# Altium PCB OpenOBS_328p_USB-copy_2026-08-19.pcbdoc
Units mm, origin at the board's own origin, x right, y up, seen from the top; angles counter-clockwise.
Board outline 128.78 x 54.48 mm, 2 copper layers (Top Layer, Bottom Layer); 43 components, 47 nets, 174 pads, 117 vias.
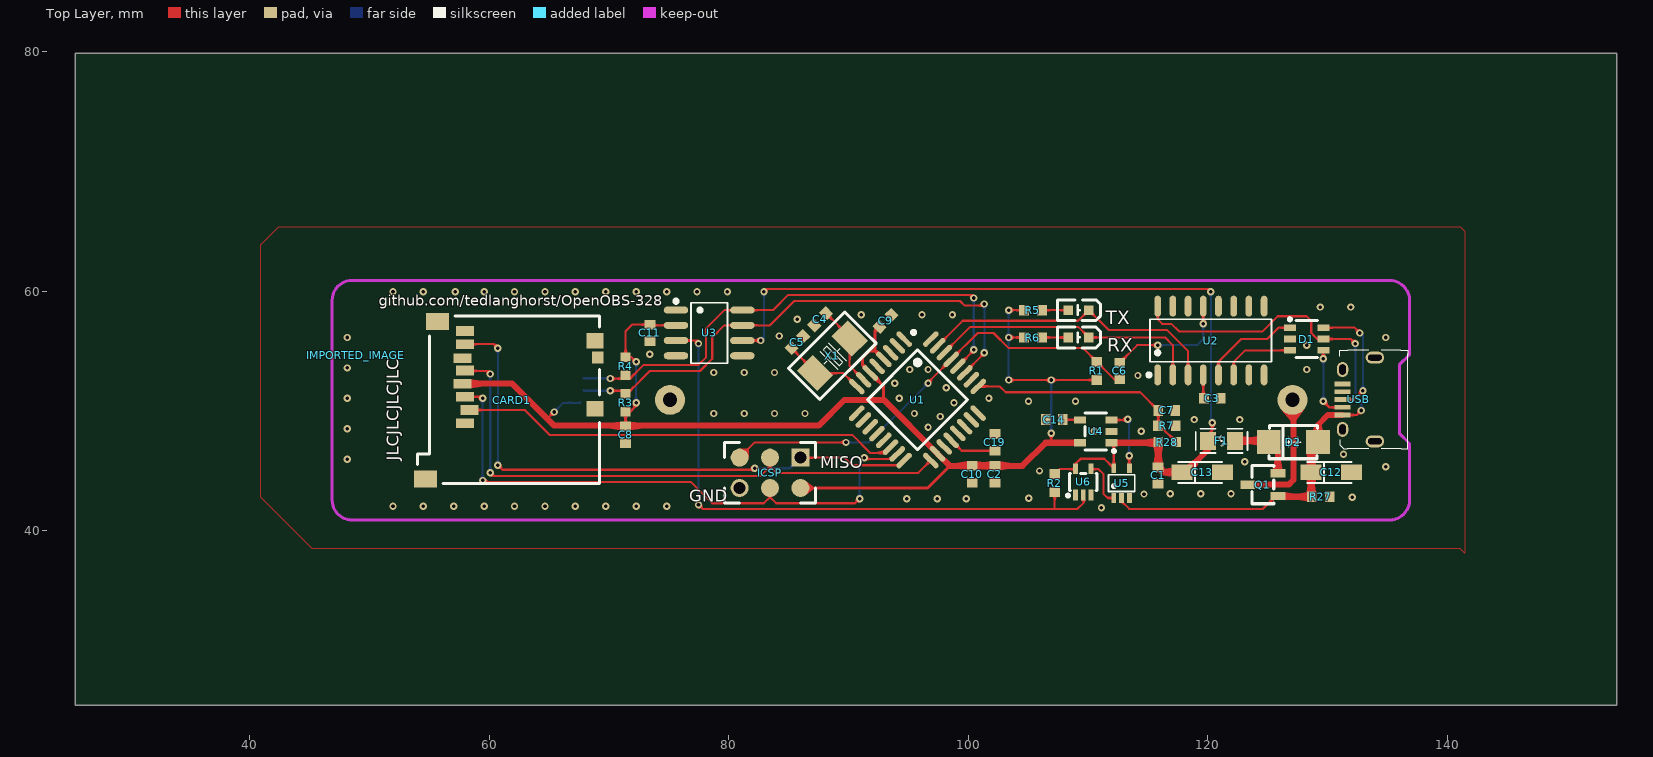
[diagram p0: Top Layer view]
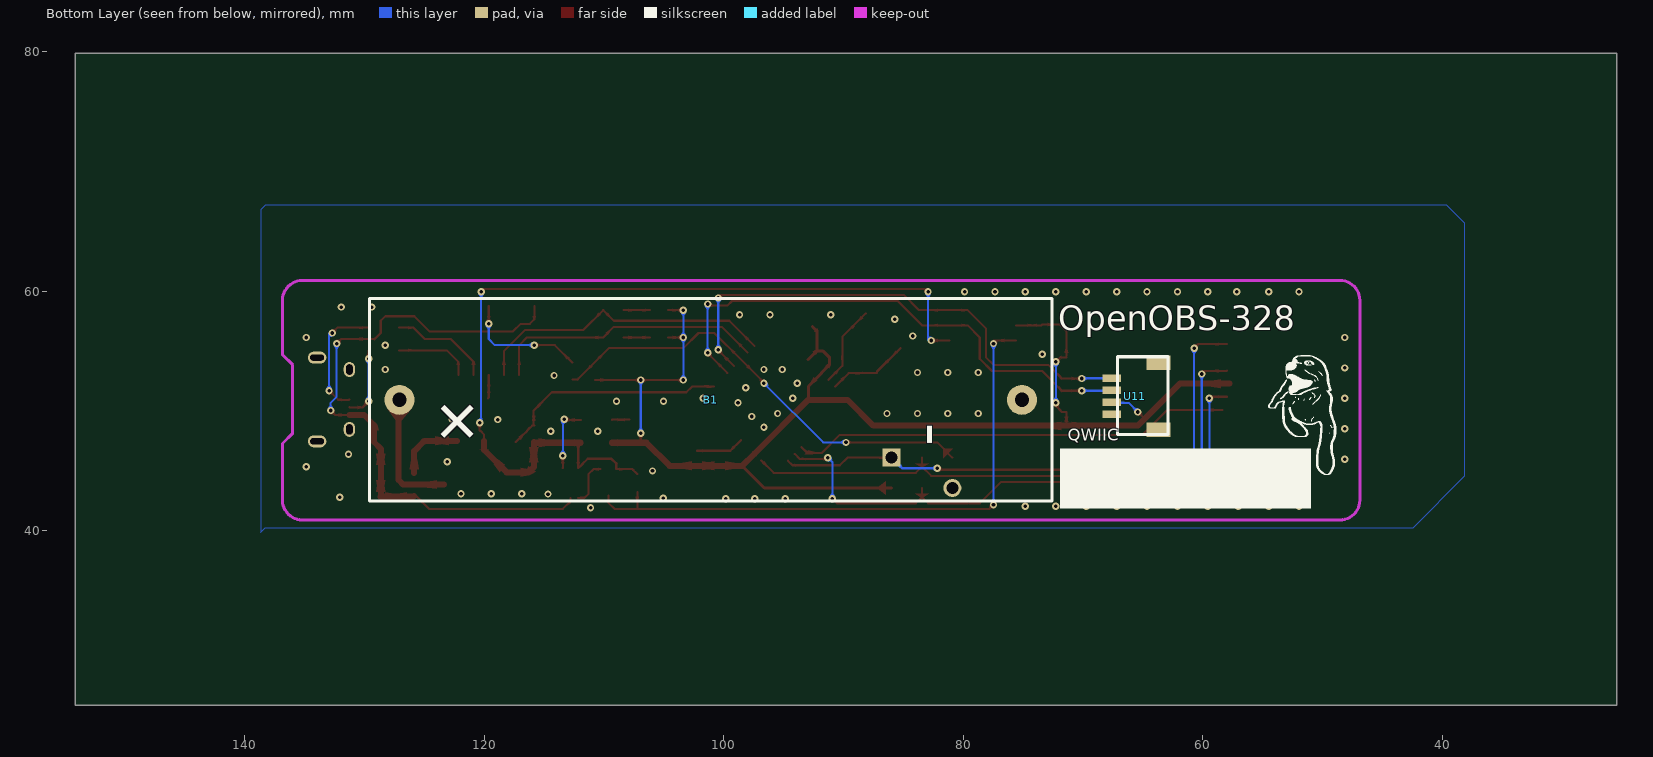
[diagram p1: Bottom Layer view, seen from below]

## Layer stack, top to bottom
Top Layer: signal copper (thickness not stored)
Dielectric: dielectric 0.32, FR-4, Dk 4.8
Bottom Layer: signal copper (thickness not stored)

## Board outline
154.178,25.4 25.4,25.4 25.4,79.883 154.178,79.883

## Components (designator, comment, footprint, x,y, rotation, side; value= is the part's Value field where it differs from the comment)
B1 "KEYSTONE 2460 1XAA" "KEYSTONE 2460 1XAA" 101.092,50.927 r0 bottom
C1 "1uF" C0603 115.858,44.609 r90 top
C2 "1uF" C0603 102.235,44.704 r270 top
C3 "10nF" C0603 120.396,51.054 r0 top
C4 "22pF" C0603 87.63,57.658 r225 top
C5 "22pF" C0603 85.725,55.753 r225 top
C6 "100nF" C0603 112.649,53.34 r270 top
C7 "1nF" C0603 116.586,50.038 r180 top
C8 "100nF" C0603 71.374,48.006 r90 top
C9 "100nF" C0603 93.091,57.531 r225 top
C10 "100nF" C0603 100.33,44.704 r90 top
C11 "100nF" C0603 73.406,56.515 r90 top
C12 "10uF" CAP-SMD_L3.2-W1.6-R-RD 130.336,44.863 r0 top
C13 "10uF" CAP-SMD_L3.2-W1.6-R-RD 119.541,44.863 r0 top
C14 "470pF" C0603 107.188,49.276 r0 top
C19 "1uF" C0603 102.235,47.371 r270 top
CARD1 "473521001" SD-SMD_SD-47352-101 61.849,50.893 r90 top
D1 "USBLC6-2SC6" SOT-23-6_L2.9-W1.6-P0.95-LS2.8-BR 128.27,56.007 r180 top
D2 "SS210" SMA_L4.3-W2.6-LS5.2-RD 127.161,47.403 r0 top
F1 "SMD0805B050TF" F0805 121.158,47.498 r180 top
ICSP "ICSP_2X3" CON2X3 83.439,44.831 r270 top
IMPORTED_IMAGE "IMPORTED_IMAGE" IMPORTED_IMAGE 48.833,54.642 r0 top
Q1 "SI2301CDS-T1-GE3" SOT-23-3_L3.0-W1.7-P0.95-LS2.9-BR 124.62,43.848 r0 top
R1 "10k" R0603 110.744,53.34 r270 top
R2 "100K" R0603 107.222,43.974 r90 top
R3 "4.7K" R0603 71.374,50.673 r270 top
R4 "4.7K" R0603 71.374,53.721 r90 top
R5 "1kΩ" R0603 105.41,58.42 r180 top
R6 "1kΩ" R0603 105.41,56.134 r180 top
R7 "1MΩ" R0603 116.586,48.768 r180 top
R27 "100K" R0603 129.447,42.831 r180 top
R28 "10M" R0603 116.62,47.403 r180 top
RX "19-213/Y2C-CQ2R2L/3T(CY)" LED0603-R-RD 109.22,56.134 r180 top
TX "19-213/Y2C-CQ2R2L/3T(CY)" LED0603-R-RD 109.22,58.42 r180 top
U1 "ATMEGA328P-AU" TQFP-32_L7.0-W7.0-P0.80-LS9.0-BL 95.758,50.927 r225 top
U2 "CH340C" SOP-16_L10.0-W3.9-P1.27-LS6.0-BL 120.269,55.88 r0 top
U3 "DS3231MZ+" SOIC-8_L4.9-W3.9-P1.27-LS6.0-BL 78.359,56.515 r270 top
U4 "TC1185-3.3VCT713" SOT-23-5_L3.0-W1.7-P0.95-LS2.8-BR 110.651,48.292 r0 top
U5 "74AHC1G32GW,125" SOT-353_L2.2-W1.4-P0.65-LS2.4-BR 112.81,43.974 r270 top
U6 "SN74LVC1G14DCKR" SC-70-5_L2.1-W1.3-P0.65-LS2.1-BR 109.601,44.069 r270 top
U11 "QWIIC" "QWIIC CONNECTOR" 66.802,50.927 r270 bottom
USB "10118194-0001LF" MICRO-USB-SMD_10118194-0001LF 132.622,50.959 r90 top
X1 "8MHz" CRYSTAL-SMD_L5.0-W3.2 88.646,54.61 r45 top

## Footprints (in the part's own frame and the unit in brackets; to place one, negate y for a bottom-side part, rotate by r counter-clockwise, add the part's x,y. Pads: shape width x height; smd on the part's side, far side on the other; paste and mask are expansions set on the pad)
C0603 [mm]
  rect 0.8x0.9 smd paste+0 mask+0.051: 1(-0.7,0) 2(0.7,0)
CAP-SMD_L3.2-W1.6-R-RD [mm]
  rect 1.758x1.296 smd paste+0 mask+0.051: 1(-1.686,0) 2(1.686,0)
  silkscreen extent -2.06,-0.95 1.68,0.95
CON2X3 [mm]
  rect 1.5x1.5 hole 1.016 paste+0 mask+0.102: 1(-1.27,2.54)
  round 1.5 smd paste+0 mask+0.102: 2(1.27,2.54) 3(-1.27,0) 4(1.27,0) 5(-1.27,-2.54)
  round 1.5 hole 1.016 paste+0 mask+0.102: 6(1.27,-2.54)
  silkscreen extent -2.54,-3.81 2.54,3.81
CRYSTAL-SMD_L5.0-W3.2 [mm]
  rect 1.9x2.4 smd paste+0 mask+0.051: 1(-2.05,0) 2(2.05,0)
  silkscreen extent -3.32,-1.85 3.33,1.85
F0805 [mm]
  rect 1.335x1.5 smd paste-100 mask+0.051: 1(-1.142,0) 2(1.142,0)
  silkscreen extent -2.16,-1.02 2.16,1.02
IMPORTED_IMAGE [mm]
"KEYSTONE 2460 1XAA" [mm]
  round 2.5 hole 1.2 paste+0 mask+0.102: 1(26,0) 2(-26,0)
  silkscreen extent -28.5,-8.45 28.5,8.45
LED0603-R-RD [mm]
  rect 0.8x0.8 smd paste+0 mask+0.051: 1(0.851,0) 2(-0.851,0)
  silkscreen extent -1.82,-0.86 1.77,0.86
MICRO-USB-SMD_10118194-0001LF [mm]
  rect 0.4x1.35 smd paste-100 mask+0.051: 1(-1.301,1.35) 2(-0.65,1.35) 3(0,1.35) 4(0.65,1.35) 5(1.3,1.35)
  oval 1x1.55 hole 0.5 slot 1.15 at 90 deg paste+0 mask+0.051: 6(-3.5,-1.35) 6(3.5,-1.35)
  oval 1.25x0.95 hole 0.55 slot 0.85 at 0 deg paste+0 mask+0.051: 6(-2.499,1.35) 6(2.499,1.35)
  silkscreen extent -4.1,-4.1 4.1,1.6
"QWIIC CONNECTOR" [mm]
  rect 0.6x1.55 smd paste+0 mask+0.051: 1(1.2,-0.8) 2(0.2,-0.8) 3(-0.8,-0.8) 4(-1.8,-0.8)
  rect 1.2x2 smd paste+0 mask+0.051: 5(-3.1,3.1) 6(2.5,3.1)
  silkscreen extent -3.6,-0.3 2.9,3.9
R0603 [mm]
  rect 0.806x0.864 smd paste-100 mask+0.051: 1(-0.753,0) 2(0.753,0)
SC-70-5_L2.1-W1.3-P0.65-LS2.1-BR [mm]
  rect 0.9x0.4 smd paste+0 mask+0.051: 1(1.1,-0.65) 2(1.1,0) 3(1.1,0.65) 4(-1.1,0.65) 5(-1.1,-0.65)
  silkscreen extent -0.7,-1.4 1.27,1.15
SD-SMD_SD-47352-101 [mil]
  rect 31.5x59.1 smd paste+0 mask+2: 1(-75.35,153.5) 2(-32.05,137.7) 3(11.25,153.5) 4(54.55,161.3) 5(97.85,153.5) 6(137.79,161.42) 7(184.45,153.5)
  rect 31.5x59.05 smd paste+0 mask+2: 8(227.75,153.45)
  rect 39.37x37.4 smd paste+0 mask+2: 9(141.2,-282.95)
  rect 55.1x74.8 smd paste+0 mask+2: EH(-258.85,282.95) EH(258.85,243.65)
  rect 51.18x55.12 smd paste+0 mask+2: EH(-28.5,-274.1) EH(195.9,-274.1)
  silkscreen extent -275,-290 277,309
SMA_L4.3-W2.6-LS5.2-RD [mm]
  rect 2x2 smd paste+0 mask+0.102: 1(-2.057,0) 2(2.057,0)
  silkscreen extent -2.03,-1.4 2.01,1.4
SOIC-8_L4.9-W3.9-P1.27-LS6.0-BL [mm]
  oval 0.588x2.045 smd paste+0 mask+0.051: 1(-1.905,-2.773) 2(-0.635,-2.773) 3(0.635,-2.773) 4(1.905,-2.773) 5(1.905,2.773) 6(0.635,2.773) 7(-0.635,2.773) 8(-1.905,2.773)
  silkscreen extent -2.8,-2.92 2.53,1.52
SOP-16_L10.0-W3.9-P1.27-LS6.0-BL [mm]
  oval 0.56x1.745 smd paste+0 mask+0.051: 1(-4.445,-2.873) 2(-3.175,-2.873) 3(-1.905,-2.873) 4(-0.635,-2.873) 5(0.635,-2.873) 6(1.905,-2.873) 7(3.175,-2.873) 8(4.445,-2.873) 9(4.445,2.873) 10(3.175,2.873) 11(1.905,2.873) 12(0.635,2.873) 13(-0.635,2.873) 14(-1.905,2.873) 15(-3.175,2.873) 16(-4.445,2.873)
  silkscreen extent -5.33,-3.02 5.08,1.77
SOT-23-3_L3.0-W1.7-P0.95-LS2.9-BR [mm]
  rect 1.25x0.7 smd paste+0 mask+0.102: 1(1.25,-0.95) 2(1.25,0.95) 3(-1.25,0)
  silkscreen extent -0.9,-1.6 0.9,1.6
SOT-23-5_L3.0-W1.7-P0.95-LS2.8-BR [mm]
  rect 1x0.6 smd paste+0 mask+0.051: 1(1.3,-0.95) 2(1.3,0) 3(1.3,0.95) 4(-1.3,0.95) 5(-1.3,-0.95)
  silkscreen extent -0.9,-1.78 1.65,1.55
SOT-23-6_L2.9-W1.6-P0.95-LS2.8-BR [mm]
  rect 1x0.55 smd paste+0 mask+0.051: 1(1.4,-0.95) 2(1.4,0) 3(1.4,0.95) 4(-1.4,0.95) 5(-1.4,0) 6(-1.4,-0.95)
  silkscreen extent -0.9,-1.78 1.52,1.55
SOT-353_L2.2-W1.4-P0.65-LS2.4-BR [mm]
  rect 0.8x0.4 smd paste+0 mask+0.051: 1(1.25,-0.65) 2(1.25,0) 3(1.25,0.65) 4(-1.25,0.65) 5(-1.25,-0.65)
  silkscreen extent -0.7,-1.1 0.7,1.1
TQFP-32_L7.0-W7.0-P0.80-LS9.0-BL [mm]
  oval 0.45x1.65 smd paste+0 mask+0.051: 1(-2.8,-4.369) 2(-2,-4.369) 3(-1.2,-4.369) 4(-0.4,-4.369) 5(0.4,-4.369) 6(1.2,-4.369) 7(2,-4.369) 8(2.8,-4.369) 17(2.8,4.369) 18(2,4.369) 19(1.2,4.369) 20(0.4,4.369) 21(-0.4,4.369) 22(-1.2,4.369) 23(-2,4.369) 24(-2.8,4.369)
  oval 1.65x0.45 smd paste+0 mask+0.051: 9(4.382,-2.8) 10(4.382,-2) 11(4.381,-1.2) 12(4.381,-0.4) 13(4.381,0.4) 14(4.381,1.2) 15(4.382,2) 16(4.382,2.8) 25(-4.382,2.8) 26(-4.382,2) 27(-4.381,1.2) 28(-4.381,0.4) 29(-4.381,-0.4) 30(-4.381,-1.2) 31(-4.382,-2) 32(-4.382,-2.8)
  silkscreen extent -3.91,-4.36 2.94,2.95

## Via types
v1: diameter 0.61, hole 0.305, Top Layer to Bottom Layer, tented both sides, 117 vias

## Nets (pads, with @x,y where several pads share a name; then routed paths per layer and width w, separated by ;. In a path a pad name is that pad's centre, name@x,y a point inside that pad or via, vN(x,y) a via of type N, cw(c..) or ccw(c..) an arc to the next point about the centre after c; other vN are vias at no path point)
C4_1: C4.1 U1.7 X1.2 | length 6.8
  Top Layer w0.175: C4.1 90.096,56.182 X1.2 90.096,53.762 U1.7
C5_2: C5.2 U1.8 X1.1 | length 6.9
  Top Layer w0.175: C5.2 87.196,53.292 X1.1 89.565,53.16 U1.8
C19_2: C19.2 U1.20 | length 4
  Top Layer w0.175: U1.20 99.449,46.67 C19.2
CS: CARD1.2 U1.14 | length 36.9
  Top Layer w0.175: CARD1.2@58.351,50.081 62.949,50.081 65.024,48.006 90.297,48.006 91.821,46.482 93.01,46.482 U1.14
GND: B1.2 C1.1 C2.2 C3.2 C4.2 C5.1 C7.1 C8.1 C9.1 C10.1 C11.1 C12.2 C13.2 C14.1 C19.1 CARD1.6 CARD1.EH D1.2 ICSP.6 R7.1 R27.1 U1.3 U1.5 U1.21 U2.1 U3.5 U4.2 U5.3 U6.3 U11.1 USB.5 USB.6
  other v1: 111.125,41.91 51.943,42.037 54.483,42.037 57.023,42.037 59.563,42.037 62.103,42.037 64.643,42.037 67.183,42.037 69.723,42.037 72.263,42.037 74.803,42.037 94.869,42.672 97.409,42.672 99.822,42.672 105.063,42.704 132.08,42.799 114.681,43.053 116.874,43.085 119.414,43.085 121.954,43.085 105.952,44.99 134.874,45.339 123.097,45.752 48.133,45.974 131.351,46.387 110.524,48.292 114.461,48.292 48.133,48.514 96.647,48.641 118.872,49.276 122.682,49.276 97.663,49.53 78.74,49.784 81.28,49.784 83.82,49.784 86.36,49.784 95.504,49.784 98.806,50.673 105.029,50.8 108.966,50.8 48.133,51.054 94.234,51.054 101.727,51.054 98.171,51.943 93.853,52.324 114.173,52.959 78.74,53.213 81.28,53.213 83.82,53.213 95.123,53.467 96.647,53.467 128.27,53.467 48.133,53.594 73.406,54.737 128.27,55.499 48.133,56.134 134.874,56.134 84.201,56.261 85.725,57.658 91.059,58.039 96.139,58.039 98.679,58.039 129.413,58.674 131.953,58.674 51.943,59.944 54.483,59.944 57.15,59.944 59.563,59.944 62.103,59.944 64.643,59.944 67.183,59.944 69.723,59.944 72.263,59.944 74.803,59.944 77.343,59.944 79.883,59.944
MISO: CARD1.7 ICSP.1 U1.16 | length 47.7
  Top Layer w0.175: CARD1.7 60.373,55.578 v1(60.706,55.244) ; v1(60.706,45.465) 61.087,45.085 78.613,45.085 82.042,45.085 v1(82.169,45.212) ; v1@82.169,45.086 v1(82.169,45.212) ; ICSP.1 89.662,46.101 90.297,45.466 94.257,45.466 U1.16
  Bottom Layer w0.175: v1(60.706,45.465) v1(60.706,55.244) ; v1(82.169,45.212) 85.09,45.212 ICSP.1
MOSI: CARD1.3 ICSP.4 U1.15 | length 49.2
  Top Layer w0.175: CARD1.3@57.95,51.181 59.309,51.181 v1(59.436,51.053) ; v1(59.436,44.195) 59.563,44.069 76.835,44.069 78.613,42.291 79.502,42.291 ; 79.629,42.292 82.931,42.292 83.439,42.8 ; v1(90.932,42.672) 90.551,42.292 83.947,42.292 83.439,42.8 ; v1(91.313,46.101) 91.44,46.101 91.567,45.974 93.632,45.974 U1.15@94.074,46.416 ; 83.439,42.8 ICSP.4 83.439,42.8
  Bottom Layer w0.175: v1(59.436,44.195) v1(59.436,51.053) ; v1(90.932,42.672) 90.932,45.721 v1(91.313,46.101)
PINTERRUPT: R2.1 U3.3 U6.2 | length 50
  Top Layer w0.175: U3.3 77.216,55.88 v1(77.47,55.626) ; v1(77.47,42.164) 77.818,41.816 109.126,41.816 109.634,42.324 U6.2@109.634,42.941 ; R2.1 107.221,41.829 107.234,41.816
  Bottom Layer w0.175: v1(77.47,42.164) 77.47,49.022 77.47,51.562 77.47,52.07 v1(77.47,55.626)
PRESET: C6.2 ICSP.5 R1.1 U1.29 | length 37.7
  Top Layer w0.175: ICSP.5 82.169,47.372 v1(89.789,47.371) ; v1(96.647,52.324) 96.647,52.382 U1.29 100.78,56.515 102.108,56.515 103.375,55.248 109.601,55.245 ; 109.593,55.245 R1.1 112.197,52.639 C6.2
  Bottom Layer w0.175: v1(89.789,47.371) 91.694,47.372 v1(96.647,52.324)
Q1_2: D2.1 F1.1 Q1.2 | length 5.8
  Top Layer w0.508: F1.1 125.009,47.498 D2.1 125.87,46.637 Q1.2
R28_1: C7.2 R7.2 R28.1 U1.25 | length 19.3
  Top Layer w0.175: U1.25 102.641,52.045 103.124,51.562 114.361,51.562 C7.2 115.885,48.821 R7.2 116.007,48.768 R28.1
RX: RX.2 U1.30 U2.2 | length 23.1
  Top Layer w0.175: U1.30 100.157,57.023 101.3,57.023 109.182,57.023 RX.2 116.459,56.134 117.094,55.499 U2.2
RX_1: R6.1 RX.1 | length 2.2
  Top Layer w0.175: R6.1@106.164,56.134 RX.1
S$174694: 
S$174698: 
S$174702: 
SCK: CARD1.5 ICSP.3 U1.17 | length 49.9
  Top Layer w0.175: CARD1.5@57.95,53.381 57.988,53.34 59.817,53.34 v1(60.071,53.085) ; v1(60.071,44.83) 60.325,44.577 82.676,44.577 83.439,45.34 ; 86.995,44.831 95.839,44.831 U1.17 ; 86.995,44.832 83.947,44.832 83.439,45.34 ; 83.439,45.34 ICSP.3 83.439,45.34
  Bottom Layer w0.175: v1(60.071,44.83) v1(60.071,53.085)
SCL: R4.1 U1.28 U3.8 U11.4 | length 43.4
  Top Layer w0.175: v1(70.104,52.705) 71.755,52.705 72.898,53.848 77.47,53.848 78.105,54.483 78.105,55.222 ; 78.105,55.118 78.105,56.896 79.629,58.42 U3.8 83.693,58.42 84.963,59.69 99.314,59.69 100.203,59.69 v1(100.457,59.436) ; U1.28 100.457,55.06 v1(100.457,55.118)
  Bottom Layer w0.175: U11.4@67.856,52.728 70.081,52.728 v1(70.104,52.705) ; v1(100.457,55.118) v1(100.457,59.436)
SDA: R3.1 U1.27 U3.7 U11.3 | length 44.4
  Top Layer w0.175: v1(70.104,51.689) 71.755,51.689 73.406,53.34 73.787,53.34 77.597,53.34 78.613,54.356 78.613,54.568 ; 78.613,54.483 78.613,56.134 79.629,57.15 U3.7 83.439,57.15 85.471,59.182 99.314,59.182 99.695,58.801 101.219,58.801 v1(101.346,58.928) ; U1.27 101.346,54.818 v1(101.346,54.864)
  Bottom Layer w0.175: U11.3@67.856,51.727 67.894,51.689 v1(70.104,51.689) ; v1(101.346,54.864) v1(101.346,58.928)
TX: TX.2 U1.31 U2.3 | length 25.6
  Top Layer w0.175: U1.31@97.442,55.438 99.535,57.534 100.678,57.534 ; 100.679,57.532 109.182,57.532 ; 109.182,57.531 TX.2 111.722,56.769 114.808,56.769 116.586,56.769 118.364,54.991 U2.3
TX_1: R5.1 TX.1 | length 2.2
  Top Layer w0.175: R5.1@106.164,58.42 TX.1
U1_1: U1.1
U1_2: U1.2
U1_9: U1.9
U1_10: U1.10
U1_11: U1.11
U1_12: U1.12
U1_13: U1.13
U1_19: U1.19
U1_22: U1.22
U1_23: U1.23
U1_24: U1.24
U1_26: U1.26
U1_32: U1.32
U2_4: C3.1 U2.4 | length 2
  Top Layer w0.175: U2.4 119.634,51.115 C3.1
U2_5: D1.1 U2.5 | length 8.5
  Top Layer w0.175: U2.5 120.904,54.102 122.809,56.007 124.968,56.007 125.918,56.957 D1.1@127.124,56.957
U2_6: D1.3 U2.6 | length 6.4
  Top Layer w0.175: U2.6 122.174,54.102 123.129,55.057 D1.3@127.124,55.057
U2_13: C6.1 U2.13 | length 10.5
  Top Layer w0.175: C6.1 114.107,55.499 v1(115.824,55.499) ; v1(119.634,57.277) U2.13
  Bottom Layer w0.175: v1(115.824,55.499) 119.126,55.5 119.634,56.008 v1(119.634,57.277)
U4_4: C14.2 U4.4 | length 1.5
  Top Layer w0.175: C14.2 109.316,49.276 U4.4@109.352,49.24
U5_1: U5.1 U6.4 | length 3.8
  Top Layer w0.175: U6.4@110.284,45.141 110.881,45.141 111.285,44.737 111.285,43.086 111.646,42.725 U5.1@112.159,42.725
U5_4: U4.3 U5.4 | length 5.5
  Top Layer w0.175: U4.3@111.95,49.243 113.251,49.243 v1(113.318,49.308) ; v1(113.445,46.26) 113.444,45.24 U5.4
  Bottom Layer w0.175: v1(113.318,49.308) 113.445,49.182 v1(113.445,46.26)
USB_2: D1.4 USB.2 | length 6.1
  Top Layer w0.175: v1(129.667,50.8) 130.175,50.292 131.254,50.292 USB.2@131.272,50.307 ; v1(129.667,54.356) D1.4
  Bottom Layer w0.175: v1(129.667,50.8) v1(129.667,54.356)
USB_3: D1.6 USB.3 | length 10.2
  Top Layer w0.175: D1.6 132.273,56.957 v1(132.715,56.515) ; USB.3@131.272,50.957 131.303,50.927 132.207,50.927 v1(132.969,51.689)
  Bottom Layer w0.175: v1(132.715,56.515) 132.969,56.261 v1(132.969,51.689)
VBAT: B1.1 Q1.3 | length 10.7
  Top Layer w0.508: Q1.3 126.779,43.848 127.16,44.229 127.16,50.927 B1.1
VCC: C2.1 C8.2 C9.2 C10.2 C11.2 CARD1.4 ICSP.2 R1.2 R3.2 R4.2 R5.2 R6.2 U1.4 U1.6 U1.18 U3.2 U4.5 U11.2 | length 117.9
  Top Layer w0.175: 64.835,49.338 65.405,49.907 v1(65.405,49.911) ; C8.2 R3.2 71.763,49.919 72.263,50.419 v1(72.263,50.673) ; R4.2 71.89,54.475 v1(72.263,54.102) ; R4.2@71.374,54.602 71.374,56.642 71.948,57.216 C11.2 73.472,57.15 U3.2 ; v1(103.378,52.578) v1(106.934,52.578) R1.2 ; v1(103.378,56.134) R6.2 ; v1(103.378,58.42) R5.2 ; 106.934,47.343 v1(106.934,48.133)
  Top Layer w0.254: ICSP.2 96.609,43.562 98.453,45.406 ; C9.2 92.202,56.642 92.202,55.049 U1.4 92.26,54.991 91.694,54.991 91.186,54.483 91.186,53.848 91.821,53.213 U1.6 92.928,52.057 92.928,50.927
  Top Layer w0.508: CARD1.4 61.892,52.278 65.405,48.768 87.503,48.768 89.662,50.927 92.928,50.927 U1.18 98.453,45.405 C10.2 C2.1 104.521,45.405 106.459,47.343 U4.5@109.349,47.343
  Bottom Layer w0.175: v1(65.405,49.911) 66.167,50.673 67.549,50.673 U11.2 ; v1(72.263,50.673) v1(72.263,54.102) ; v1(103.378,52.578) v1(103.378,56.134) v1(103.378,58.42) ; v1(106.934,48.133) v1(106.934,52.578)
VIN: C1.2 C13.1 F1.2 R2.2 R28.2 U3.6 U4.1 U5.5 U6.5 | length 76.1
  Top Layer w0.175: U3.6 v1(82.677,55.88) ; v1(82.931,59.944) 83.185,60.198 84.963,60.198 120.015,60.198 ; R2.2@107.221,44.729 107.632,45.141 108.984,45.141 108.984,45.611 109.38,46.007 111.376,46.007 U5.5 112.159,47.135 U4.1@111.95,47.343 ; F1.2 120.015,48.006 120.396,48.387 v1(120.396,49.022) ; 120.034,60.198 120.269,59.963 v1(120.269,59.944)
  Top Layer w0.508: U4.1@111.95,47.343 115.804,47.343 115.865,47.404 115.857,45.311 116.304,44.864 C13.1 118.143,44.864 120.015,46.736 F1.2
  Bottom Layer w0.175: v1(82.677,55.88) 82.931,56.134 v1(82.931,59.944) ; v1(120.269,59.944) 120.269,49.149 v1(120.396,49.022)
VUSB: C12.1 D1.5 D2.2 Q1.1 R27.2 U2.16 U5.2 USB.1 | length 53.4
  Top Layer w0.175: U5.2@112.809,42.725 112.809,42.451 113.444,41.816 124.62,41.816 125.702,42.898 Q1.1 ; U2.16 115.824,57.658 116.205,57.277 116.967,57.277 117.602,56.642 124.587,56.642 125.857,57.912 128.27,57.912 128.651,57.531 128.651,56.515 129.159,56.007 D1.5@129.923,56.007 ; D1.5 131.953,56.007 v1(132.334,55.626) ; USB.1@131.272,49.657 132.461,49.657 v1(132.842,50.038)
  Top Layer w0.508: Q1.1 125.936,42.832 128.692,42.832 128.648,42.875 C12.1 128.648,46.835 D2.2 129.217,48.826 130.05,49.66 USB.1
  Bottom Layer w0.175: v1(132.334,55.626) 132.334,51.181 132.842,50.673 v1(132.842,50.038)
pads on no net: CARD1.1 CARD1.8 CARD1.9 U2.7 U2.8 U2.9 U2.10 U2.11 U2.12 U2.14 U2.15 U3.1 U3.4 U6.1 U11.5 U11.6 USB.4

## Polygon pours and split planes (outlines as drawn)
GND on Bottom Layer (solid): 138.684,66.802 138.684,39.878 138.303,40.259 42.418,40.259 38.1,44.577 38.1,65.659 39.624,67.183 138.303,67.183 138.684,66.802
GND on Top Layer (solid): 141.478,65.024 141.478,38.1 141.097,38.481 45.212,38.481 40.894,42.799 40.894,63.881 42.418,65.405 141.097,65.405 141.478,65.024

## Keep-outs
Keep-Out Layer:
  lines w0.254: 46.863,42.544 ccw(c48.513,42.544) 48.513,40.894 ; 46.863,59.244 cw(c48.513,59.244) 48.513,60.894 ; 135.213,40.894 ccw(c135.213,42.544) 136.863,42.544 ; 135.213,60.894 cw(c135.213,59.244) 136.863,59.244

## Other copper
Top Layer:
  region net VBAT: 126.188,50.063 128.062,50.138 127.414,49.237 126.906,49.216
  region net PRESET: 80.852,46.849 81.648,46.054 81.682,46.762 81.559,46.885
  region net SCK: 84.001,45.605 82.876,45.605 83.351,45.34 83.526,45.34
  region net SCK: 84.001,45.605 82.876,45.605 83.351,45.34 83.526,45.34
  region net MOSI: 84.001,43.065 82.876,43.065 83.351,42.8 83.526,42.8
  region net MOSI: 84.001,43.065 82.876,43.065 83.351,42.8 83.526,42.8
  region net VCC: 86.475,42.999 86.475,44.124 87,43.689 87,43.435
  region net MOSI: 90.951,42.368 90.628,42.692 90.576,42.441 90.7,42.317
  region net SCL: 100.506,54.817 100.152,55.107 100.126,54.853 100.262,54.741
  region net SCL: 100.476,59.74 100.153,59.417 100.141,59.628 100.265,59.752
  region net SDA: 101.389,54.562 101.041,54.859 101.01,54.606 101.143,54.492
  region net SDA: 101.224,58.649 101.084,59.084 100.923,58.889 100.979,58.713
  region net PINTERRUPT: 77.774,42.183 77.451,41.86 77.702,41.809 77.825,41.932
  region net PRESET: 96.952,52.335 96.598,52.625 96.842,52.701 96.978,52.589
  region net MOSI: 91.575,46.257 91.435,45.822 91.68,45.886 91.736,46.062
  region net U2_13: 115.622,55.27 115.622,55.728 115.409,55.587 115.409,55.411
  region net U2_13: 119.405,57.479 119.863,57.479 119.721,57.692 119.546,57.692
  region net U5_4: 113.154,49.051 113.083,49.502 112.894,49.331 112.922,49.156
  region net U5_4: 113.673,46.058 113.216,46.059 113.356,45.845 113.531,45.845
  region net MISO: 82.047,44.933 81.907,45.368 81.746,45.173 81.802,44.997
  region net MISO: 60.725,55.548 60.402,55.226 60.351,55.476 60.475,55.6
  region net MISO: 61.01,45.485 60.687,45.161 60.938,45.11 61.062,45.234
  region net SCK: 60.09,53.389 59.767,53.067 59.755,53.278 59.879,53.402
  region net SCK: 60.375,44.85 60.052,44.526 60.263,44.515 60.387,44.639
  region net PRESET: 89.588,47.6 89.587,47.143 89.374,47.284 89.374,47.459
  region net MOSI: 59.315,51.333 59.174,50.898 59.013,51.093 59.069,51.269
  region net MOSI: 59.698,44.352 59.558,43.916 59.803,43.981 59.859,44.157
  region net SCL: 70.306,52.476 70.306,52.934 70.519,52.793 70.519,52.617
  region net SDA: 70.306,51.46 70.306,51.918 70.519,51.777 70.519,51.601
  region net VCC: 72.412,50.407 71.98,50.559 72.034,50.314 72.217,50.249
  region net VCC: 72.282,54.406 71.959,54.083 71.908,54.334 72.031,54.457
  region net VIN: 82.475,55.651 82.475,56.109 82.262,55.968 82.262,55.792
  region net VIN: 83.235,59.925 82.912,60.248 83.123,60.26 83.247,60.136
  region net USB_2: 129.971,50.819 129.648,50.496 129.898,50.445 130.022,50.569
  region net USB_2: 129.896,54.557 129.439,54.559 129.581,54.771 129.756,54.771
  region net USB_3: 132.988,51.385 132.664,51.708 132.613,51.457 132.737,51.334
  region net USB_3: 132.734,56.819 132.41,56.496 132.359,56.747 132.483,56.87
  region net VUSB: 132.353,55.93 132.029,55.607 131.978,55.858 132.102,55.981
  region net VUSB: 132.861,49.734 132.537,50.057 132.486,49.806 132.61,49.683
  region net PINTERRUPT: 77.489,55.93 77.166,55.607 77.154,55.818 77.278,55.942
  region net VCC: 65.426,49.607 65.101,49.928 65.051,49.677 65.176,49.554
  region net VCC: 107.136,52.35 107.135,52.807 107.349,52.666 107.349,52.491
  region net VCC: 106.732,52.349 106.732,52.807 106.519,52.666 106.519,52.49
  region net VCC: 106.705,47.931 107.163,47.931 107.021,47.718 106.846,47.718
  region net VIN: 120.624,48.821 120.167,48.82 120.308,48.607 120.483,48.607
  region net VIN: 120.3,60.247 119.964,59.937 119.97,60.139 120.098,60.257
  region net VCC: 103.58,55.905 103.58,56.363 103.793,56.222 103.793,56.046
  region net VCC: 103.58,58.191 103.58,58.649 103.793,58.508 103.793,58.332
  region net VCC: 103.58,52.349 103.58,52.807 103.793,52.666 103.793,52.49
  region net VCC: 104.253,58.289 104.253,58.551 103.991,58.508 103.991,58.332
  region net TX_1: 106.566,58.289 106.566,58.551 106.829,58.508 106.829,58.332
  region net VCC: 104.253,56.003 104.253,56.265 103.991,56.222 103.991,56.046
  region net RX_1: 106.566,56.003 106.566,56.265 106.829,56.222 106.829,56.046
  region net R28_1: 115.486,50.246 115.588,50.488 115.38,50.668 115.306,50.494
  region net R28_1: 116.017,49.588 115.755,49.588 115.798,49.325 115.973,49.325
  region net R28_1: 115.755,49.2 116.017,49.2 115.973,49.462 115.798,49.462
  region net R28_1: 116.236,48.671 116.236,48.409 116.498,48.154 116.498,48.401
  region net VUSB: 126.495,43.213 126.495,42.548 127.257,42.578 127.257,43.086
  region net VUSB: 125.506,42.548 125.245,42.567 125.001,42.321 125.232,42.304
  region net Q1_2: 125.489,45.148 126.251,45.148 126.124,45.91 125.616,45.91
  region net VBAT: 123.995,44.198 123.995,43.498 124.757,43.594 124.757,44.102
  region net VIN: 108.861,45.619 109.123,45.619 109.378,45.881 109.131,45.881
  region net VIN: 108.751,45.01 108.751,45.272 108.488,45.228 108.488,45.053
  region net U5_1: 110.451,45.272 110.451,45.01 110.713,45.053 110.713,45.228
  region net PINTERRUPT: 109.765,42.519 109.503,42.519 109.546,42.324 109.721,42.324
  region net VIN: 120.126,48.248 120.388,48.248 120.458,48.325 120.272,48.387
  region net VIN: 120.396,46.748 119.634,46.748 119.761,46.736 120.269,46.736
  region net Q1_2: 122.968,47.879 122.968,47.117 123.73,47.244 123.73,47.752
  region net U2_6: 126.37,54.926 126.37,55.188 126.107,55.145 126.107,54.97
  region net U2_5: 126.37,56.826 126.37,57.088 126.107,57.044 126.107,56.869
  region net USB_3: 130.17,57.088 130.17,56.826 130.432,56.869 130.432,57.044
  region net VUSB: 130.17,56.138 130.17,55.876 130.432,55.919 130.432,56.095
  region net VUSB: 129.17,55.876 129.17,56.138 129.159,56.095 129.159,55.919
  region net USB_2: 129.8,54.782 129.537,54.782 129.58,54.519 129.755,54.519
  region net VCC: 108.851,47.042 108.851,47.642 108.089,47.597 108.089,47.089
  region net U4_4: 108.851,49.145 108.851,49.407 108.589,49.364 108.589,49.188
  region net U5_4: 112.451,49.374 112.451,49.112 112.714,49.156 112.714,49.331
  region net VIN: 112.451,47.642 112.451,47.042 113.213,47.089 113.213,47.597
  region net VIN: 112.29,47.042 112.027,47.042 112.071,46.779 112.246,46.779
  region net USB_3: 131.947,51.058 131.947,50.796 132.207,50.839 132.207,51.015
  region net USB_2: 130.596,50.161 130.596,50.423 130.333,50.38 130.333,50.204
  region net VUSB: 131.947,49.788 131.947,49.526 132.21,49.569 132.21,49.745
  region net U5_1: 111.96,42.594 111.96,42.857 111.697,42.813 111.697,42.638
  region net VUSB: 113.01,42.388 112.755,42.324 113.017,42.119 113.214,42.169
  region net U5_4: 113.313,45.624 113.575,45.624 113.531,45.887 113.356,45.887
  region net VIN: 111.96,45.293 111.96,45.555 111.697,45.81 111.697,45.563
  region net VIN: 112.027,45.624 112.29,45.624 112.246,45.887 112.071,45.887
  region net VUSB: 128.267,45.511 129.029,45.511 128.902,46.273 128.394,46.273
  region net VUSB: 129.029,44.215 128.267,44.215 128.394,43.453 128.902,43.453
  region net VIN: 118.285,45.511 118.733,44.895 119.194,45.556 118.892,45.972
  region net VIN: 116.976,44.483 116.976,45.245 116.304,45.118 116.304,44.61
  region net C4_1: 89.216,56.877 89.402,57.063 89.185,57.217 89.061,57.094
  region net C4_1: 90.189,54.622 90.003,54.808 90.009,54.431 90.184,54.256
  region net C5_2: 86.32,53.981 86.506,54.167 86.289,54.322 86.166,54.198
  region net C5_2: 88.448,53.252 88.633,53.067 88.999,53.072 88.824,53.247
  region net VUSB: 128.836,48.403 129.598,48.403 129.471,48.826 128.963,48.826
  region net VUSB: 129.029,46.403 128.267,46.403 128.394,45.641 128.902,45.641
  region net Q1_2: 124.103,47.117 124.103,47.879 123.341,47.752 123.341,47.244
  region net MISO: 86.729,46.232 86.729,45.97 86.991,46.013 86.991,46.189
  region net RX_1: 107.969,56.003 107.969,56.265 107.706,56.222 107.706,56.046
  region net RX: 109.671,56.349 109.857,56.534 109.64,56.689 109.516,56.565
  region net RX: 110.471,56.265 110.471,56.003 110.733,56.046 110.733,56.222
  region net TX_1: 107.969,58.289 107.969,58.551 107.706,58.508 107.706,58.332
  region net TX: 109.857,58.02 109.671,58.205 109.516,57.989 109.64,57.865
  region net TX: 110.471,58.206 110.285,58.02 110.502,57.865 110.625,57.989
  region net VIN: 115.477,45.709 116.239,45.709 116.115,46.471 115.607,46.471
  region net VIN: 116.308,45.371 115.701,44.909 116.1,44.709 116.484,45.044
  region net VCC: 102.685,45.786 102.685,45.024 103.447,45.151 103.447,45.659
  region net VCC: 101.785,45.024 101.785,45.786 101.023,45.659 101.023,45.151
  region net U2_4: 119.503,51.504 119.765,51.504 119.721,51.766 119.546,51.766
  region net C4_1: 88.536,57.928 88.351,57.742 88.567,57.588 88.691,57.711
  region net C5_2: 85.641,55.032 85.455,54.847 85.672,54.692 85.795,54.816
  region net PRESET: 112.199,52.508 112.199,52.77 112.197,52.726 112.197,52.551
  region net U2_13: 112.857,54.44 113.098,54.337 113.278,54.546 113.105,54.62
  region net VCC: 71.243,49.106 71.505,49.106 71.461,49.368 71.286,49.368
  region net VCC: 71.824,49.106 71.824,48.387 72.586,48.514 72.586,49.022
  region net VCC: 70.924,48.387 70.924,49.106 70.162,49.022 70.162,48.514
  region net VCC: 92.448,56.618 92.178,56.888 92.112,56.732 92.292,56.552
  region net VCC: 100.78,45.786 100.78,45.024 101.542,45.151 101.542,45.659
  region net VCC: 99.88,45.024 99.88,45.786 99.118,45.659 99.118,45.151
  region net U4_4: 108.288,49.407 108.288,49.145 108.55,49.188 108.55,49.364
  region net C19_2: 101.785,46.539 101.785,46.801 101.522,46.757 101.522,46.582
  region net VCC: 110.312,52.454 110.312,52.716 110.049,52.672 110.049,52.497
  region net PRESET: 111.176,53.83 110.954,53.69 111.187,53.527 111.339,53.622
  region net PRESET: 110.312,54.36 110.536,54.496 110.301,54.661 110.147,54.567
  region net VCC: 71.806,50.093 71.806,49.831 72.068,50.101 72.068,50.348
  region net VCC: 71.505,49.516 71.243,49.516 71.286,49.254 71.461,49.254
  region net SDA: 70.942,51.82 70.942,51.558 70.679,51.601 70.679,51.777
  region net SDA: 71.764,51.829 71.806,51.57 72.029,51.839 71.994,52.052
  region net VCC: 71.806,54.607 71.806,54.344 71.89,54.388 71.89,54.563
  region net VCC: 71.243,54.877 71.505,54.877 71.461,55.14 71.286,55.14
  region net SCL: 71.806,52.625 71.806,52.887 72.068,53.142 72.068,52.895
  region net SCL: 70.942,52.836 70.942,52.574 70.679,52.617 70.679,52.793
  region net VUSB: 128.29,42.451 128.29,43.213 127.528,43.086 127.528,42.578
  region net VUSB: 128.29,43.263 129.029,43.263 128.902,44.025 128.394,44.025
  region net VIN: 115.463,46.971 115.463,47.724 114.701,47.597 114.701,47.089
  region net VIN: 116.244,46.971 115.482,46.971 115.606,46.209 116.114,46.209
  region net R28_1: 116.97,47.612 117.108,47.835 116.901,47.999 116.806,47.846
  region net VIN: 107.428,45.131 107.654,44.997 107.694,45.079 107.555,45.187
  region net PINTERRUPT: 107.09,42.818 107.352,42.818 107.308,42.555 107.133,42.555
  region net VCC: 72.956,57.085 72.956,57.347 72.693,57.304 72.693,57.129
  region net VCC: 73.856,57.281 73.856,57.019 74.118,57.062 74.118,57.238
  region net CS: 59.102,50.212 59.102,49.95 59.364,49.994 59.364,50.169
  region net MOSI: 58.701,51.312 58.701,51.05 58.963,51.093 58.963,51.269
  region net VCC: 58.502,52.659 58.502,51.897 59.264,52.024 59.264,52.532
  region net SCK: 58.701,53.471 58.701,53.209 58.963,53.252 58.963,53.428
  region net MISO: 58.701,55.709 58.701,55.447 58.963,55.49 58.963,55.665
  region net RX: 117.225,53.847 116.963,53.847 117.006,54.11 117.181,54.11
  region net TX: 118.495,53.847 118.233,53.847 118.276,54.11 118.451,54.11
  region net U2_4: 119.765,52.168 119.503,52.168 119.546,51.905 119.721,51.905
  region net U2_5: 121.035,53.847 120.773,53.847 120.816,54.102 120.991,54.102
  region net U2_6: 122.305,53.847 122.043,53.847 122.086,54.102 122.261,54.102
  region net VUSB: 115.955,57.913 115.693,57.913 115.736,57.658 115.911,57.658
  region net U2_13: 119.765,57.913 119.503,57.913 119.546,57.65 119.721,57.65
  region net TX: 98.088,55.9 97.903,56.086 98.119,56.24 98.243,56.116
  region net RX: 98.654,55.334 98.468,55.52 98.685,55.675 98.809,55.551
  region net PRESET: 98.112,53.662 97.927,53.848 97.772,53.631 97.896,53.507
  region net PRESET: 99.22,54.769 99.034,54.954 99.25,55.109 99.374,54.986
  region net SCL: 99.785,54.203 99.6,54.389 99.817,54.543 99.94,54.419
  region net SDA: 100.351,53.637 100.165,53.823 100.382,53.978 100.506,53.854
  region net R28_1: 101.246,52.137 101.061,51.952 101.437,51.957 101.612,52.132
  region net C19_2: 99.21,47.094 99.025,46.909 99.241,46.754 99.365,46.877
  region net SCK: 96.801,45.605 96.616,45.791 96.461,45.575 96.585,45.451
  region net MISO: 94.005,45.346 94.072,45.599 93.76,45.554 93.677,45.378
  region net MOSI: 93.491,46.15 93.175,46.062 93.208,45.886
  region net CS: 93.243,46.397 92.925,46.715 92.439,46.57 92.587,46.394
  region net C5_2: 90.228,52.683 90.043,52.497 89.888,52.714 90.012,52.837
  region net C4_1: 90.794,53.248 90.608,53.063 90.454,53.28 90.577,53.403
  region net VCC: 91.467,53.805 91.173,53.564 91.087,53.767 91.285,53.929
  region net VCC: 92.464,52.793 92.194,52.524 92.508,52.299 92.688,52.478
  region net VCC: 92.578,54.943 92.308,54.674 92.17,54.901 92.35,55.081
  region net VCC: 92.578,54.943 92.308,54.674 92.112,54.96 92.292,55.139
  region net VCC: 74.595,57.019 74.595,57.281 74.332,57.238 74.332,57.062
  region net PINTERRUPT: 76.578,55.749 76.578,56.011 76.841,55.968 76.841,55.792
  region net SCL: 80.14,58.289 80.14,58.551 79.877,58.508 79.877,58.332
  region net SCL: 82.123,58.289 82.123,58.551 82.385,58.508 82.385,58.332
  region net SDA: 80.14,57.019 80.14,57.281 79.877,57.238 79.877,57.062
  region net SDA: 82.123,57.019 82.123,57.281 82.385,57.238 82.385,57.062
  region net VIN: 82.123,55.749 82.123,56.011 82.385,55.968 82.385,55.792
Bottom Layer:
  region net MOSI: 91.16,42.874 90.703,42.874 90.844,43.087 91.019,43.087
  region net SCL: 100.228,55.32 100.686,55.32 100.544,55.533 100.369,55.533
  region net SCL: 100.228,59.234 100.686,59.234 100.544,59.021 100.369,59.021
  region net SDA: 101.574,55.066 101.117,55.066 101.258,55.279 101.433,55.279
  region net SDA: 101.574,58.726 101.117,58.726 101.258,58.513 101.433,58.513
  region net PINTERRUPT: 77.241,42.366 77.699,42.366 77.557,42.579 77.382,42.579
  region net PRESET: 96.666,52.02 96.343,52.344 96.291,52.093 96.415,51.969
  region net MOSI: 91.332,45.797 91.009,46.121 90.957,45.87 91.081,45.746
  region net U2_13: 116.026,55.271 116.025,55.728 116.239,55.587 116.239,55.412
  region net U2_13: 119.405,57.075 119.863,57.075 119.721,56.862 119.546,56.862
  region net U5_4: 113.162,49.046 113.597,49.186 113.532,48.941 113.357,48.885
  region net U5_4: 113.673,46.462 113.216,46.462 113.357,46.675 113.532,46.675
  region net MISO: 82.371,44.983 82.371,45.441 82.584,45.3 82.584,45.124
  region net MISO: 60.477,55.043 60.935,55.043 60.793,54.829 60.618,54.829
  region net MISO: 60.477,45.667 60.935,45.667 60.793,45.88 60.618,45.88
  region net SCK: 59.842,52.884 60.3,52.884 60.158,52.67 59.983,52.67
  region net SCK: 59.842,45.032 60.3,45.032 60.158,45.245 59.983,45.245
  region net PRESET: 89.991,47.143 89.99,47.6 90.204,47.459 90.204,47.284
  region net MOSI: 59.207,50.852 59.665,50.852 59.523,50.638 59.348,50.638
  region net MOSI: 59.207,44.397 59.665,44.397 59.523,44.61 59.348,44.61
  region net SCL: 69.915,52.944 69.89,52.488 69.685,52.64 69.694,52.815
  region net SDA: 69.902,51.46 69.902,51.918 69.689,51.777 69.689,51.601
  region net VCC: 72.034,50.875 72.492,50.875 72.35,51.088 72.175,51.088
  region net VCC: 72.034,53.9 72.492,53.9 72.35,53.687 72.175,53.687
  region net VIN: 82.981,55.861 82.658,56.184 82.869,56.196 82.993,56.072
  region net VIN: 82.702,59.742 83.16,59.742 83.018,59.529 82.843,59.529
  region net USB_2: 129.895,51.002 129.438,51.002 129.579,51.215 129.754,51.215
  region net USB_2: 129.895,54.154 129.438,54.154 129.579,53.941 129.754,53.941
  region net USB_3: 132.74,51.891 133.197,51.891 133.056,52.104 132.881,52.104
  region net USB_3: 133.019,56.534 132.696,56.211 132.907,56.199 133.031,56.323
  region net VUSB: 132.105,55.424 132.562,55.424 132.421,55.211 132.246,55.211
  region net VUSB: 132.613,50.24 133.07,50.24 132.929,50.453 132.754,50.453
  region net PINTERRUPT: 77.241,55.424 77.699,55.424 77.557,55.211 77.382,55.211
  region net VCC: 65.709,49.892 65.386,50.215 65.637,50.266 65.76,50.143
  region net VCC: 106.705,52.376 107.163,52.376 107.021,52.163 106.846,52.163
  region net VCC: 106.705,48.335 107.163,48.335 107.021,48.548 106.846,48.548
  region net VIN: 120.552,49.284 120.116,49.144 120.181,49.389 120.356,49.445
  region net VIN: 120.04,59.742 120.497,59.742 120.356,59.529 120.181,59.529
  region net VCC: 103.606,56.336 103.149,56.336 103.29,56.549 103.465,56.549
  region net VCC: 103.606,55.932 103.149,55.932 103.29,55.719 103.465,55.719
  region net VCC: 103.606,58.218 103.149,58.218 103.29,58.005 103.465,58.005
  region net VCC: 103.606,52.78 103.149,52.78 103.29,52.993 103.465,52.993
  region net VCC: 66.827,50.804 66.827,50.542 66.564,50.585 66.564,50.761
  region net SDA: 68.377,51.558 68.377,51.82 68.639,51.777 68.639,51.601
  region net SCL: 68.377,52.597 68.377,52.859 68.639,52.815 68.639,52.64
  region net MISO: 85.415,45.351 85.229,45.536 85.074,45.32 85.198,45.196

## Silkscreen, mask and mechanical layers (free items; w line width, h text height)
Top Overlay:
  text "github.com/tedlanghorst/OpenOBS-328" at 50.759,58.514 h1.5
  text "JLCJLCJLCJLC" at 52.443,45.847 h1 r90
Bottom Overlay:
  rectangle: 50.927,41.863 71.927,46.863
  text "OpenOBS-328" at 72.069,56.07 h3.5
  text "QWIIC" at 71.247,47.51 h1

## Text inside footprints (layer, text, board x,y; h text height)
B1: Bottom Overlay "+" at 125.112,49.513 h4 r45; Bottom Overlay "-" at 84.296,49.022 h4 r90
ICSP: Top Overlay "MISO" at 87.63,45.22 h1; Top Overlay "GND" at 76.708,42.426 h1
U11: Document "SCL" at 66.502,52.527 h0.2 r90; Document "SDA" at 66.502,51.427 h0.2 r90; Document "3.3V" at 66.502,50.427 h0.2 r90; Document "GND" at 66.502,49.427 h0.2 r90